# EAGLE board fb_dimmer_up (EAGLE 5.03)
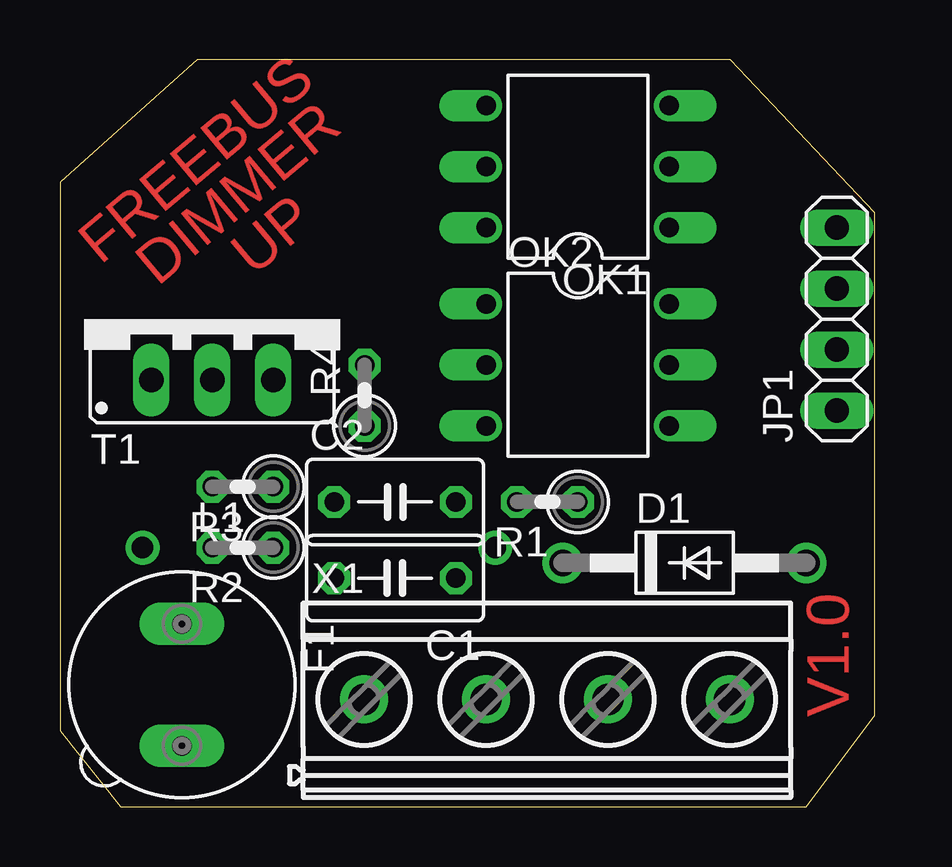
[diagram p0: board, top side]
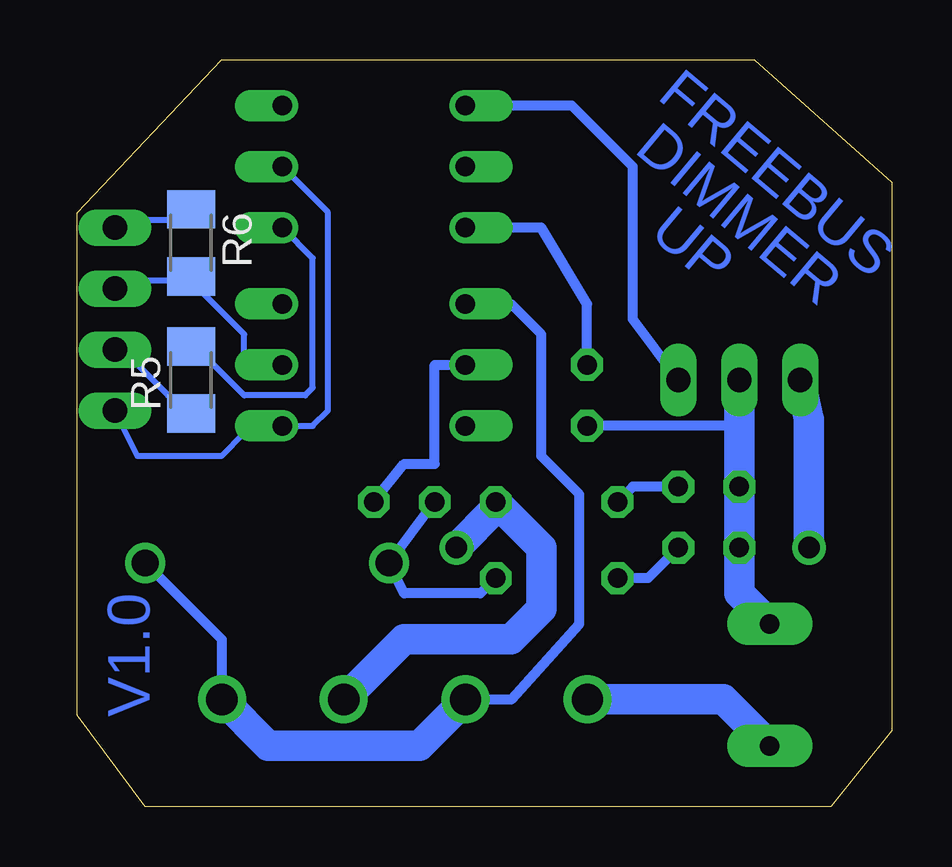
[diagram p1: board, bottom side, seen from below]

Size 33.96 x 31.11 mm. Coordinates in mm from the lower left corner, seen from the top.
Outline: 2.54,0 31.12,0 33.96,3.81 33.96,24.75 27.94,31.11 5.71,31.11 0,26.02 0,3.17 2.54,0
Copper layers (1*16): Top 0.035mm / dielectric 1.5mm / Bottom 0.035mm
Design rules "default": minimum track width 10mil, minimum drill 24mil, track to track 8mil, track to pad 8mil, pad to pad 8mil, via to via 8mil, smd to smd 8mil, copper to edge 40mil, drill to drill 8mil, minimum pad ring 10mil, minimum via ring 8mil, stop-mask expansion 4mil, vias tented up to drill 0mil, thermal gap 10mil
Net classes: 1 230V: width 0.508 mm, clearance 1.524 mm
bKeepout: 4 lines

## Footprints (pad centres in the part's own frame; a part is rotated, then mirrored left to right if it is on the bottom)
C050-035X075 = drill 0.813 octagon: 1 -2.54,0; 2 2.54,0
DO41-10 = drill 1.118 round: A 5.08,0; C -5.08,0
19560 = drill 0.813 pad 1.778 long: 1 -2.54,0; 2 2.54,0
1X04 = drill 1.016 long: 1 -3.81,0; 2 -1.27,0; 3 1.27,0; 4 3.81,0
TJ3-U2 = drill 0.9 round: 1 -7.35,0; 2 7.35,0
DIL06 = drill 0.813 offset: 1 -2.54,-3.81; 2 0,-3.81; 3 2.54,-3.81; 4 2.54,3.81; 5 0,3.81; 6 -2.54,3.81
0207/2V = drill 0.813 octagon: 1 -1.27,0; 2 1.27,0
M1206 = smd 1.6 x 2: 1 -1.4,0; 2 1.4,0
TO220DS = drill 1.016 long: A1 -2.54,-2.54; A2 0,-2.54; G 2.54,-2.54
MKDSN1,5/4-5,08 = drill 1.3 pad 2 round: 1 -7.641,0.025; 2 -2.561,0.025; 3 2.519,0.025; 4 7.599,0.025

## Placement (x,y rotation side)
C1  47nF/230V~  [C050-035X075]  13.97,9.53 180 top
C2  10nF/230V~  [C050-035X075]  13.97,12.7 0 top
D1  1N4007  [DO41-10]  26.04,10.16 0 top
F1  2A Flink  [19560]  5.08,5.08 270 top
JP1  [1X04]  32.38,20.32 90 top
L1  [TJ3-U2]  10.79,10.79 0 top
OK1  MOC3020M  [DIL06]  21.59,26.67 90 top
OK2  CNY17  [DIL06]  21.59,18.41 270 top
R1  [0207/2V]  20.32,12.7 180 top
R2  [0207/2V]  7.62,10.79 180 top
R3  [0207/2V]  7.62,13.34 180 top
R4  [0207/2V]  12.7,17.14 90 top
R5  330R  [M1206]  29.21,17.78 90 bottom
R6  10k  [M1206]  29.21,23.5 270 bottom
T1  TIC225S  [TO220DS]  6.35,20.32 0 top
X1  MKDSN1,5/4-5,08  [MKDSN1,5/4-5,08]  20.32,4.45 0 top

## Library data of the parts
C1 C2 L1 R1-R6 = rcl
D1 = diode
F1 = fuse
JP1 = pinhead
OK1 OK2 = optocoupler
T1 = triac
X1 = con-phoenix-508

## Nets
N$1: OK2.2 R1.1
N$2: C1.2 R2.1
N$3 [230V]: F1.1 R2.2 R3.2 R4.1 T1.A2
N$4 [230V]: D1.A OK2.1 X1.2 X1.4
N$5: OK1.6 R4.2
N$6 [230V]: C1.1 D1.C R1.2
N$7 [230V]: OK1.4 T1.G
N$8: JP1.1 OK1.2 OK2.4
N$9 [230V]: L1.1 T1.A1
N$10 [230V]: C2.1 R3.1
N$11 [230V]: F1.2 X1.1
N$12 [230V]: C2.2 L1.2 X1.3
N$13: OK1.1 R5.2
N$14: JP1.3 OK2.5 R6.2
N$15: JP1.4 R6.1
N$16: JP1.2 R5.1

## Tracks (layer width: path | path; a pad name or v marks a point on that pad's centre or on a via)
N$1
  Bottom 0.406: OK2.2 19.05,18.41 19.05,14.29 20.32,14.29 R1.1
N$2
  Bottom 0.406: C1.2 10.16,9.53 R2.1
N$3
  Bottom 0.406: 6.35,15.88 R4.1
  Bottom 1.27: T1.A2 6.35,15.88 R3.2 R2.2 6.35,8.89 F1.1
N$4
  Bottom 0.406: X1.4 27.92,6.96 D1.A | X1.2 15.85,4.47 13.02,7.62 13.02,13.02 14.61,14.61 14.61,19.68 15.88,20.95 OK2.1
  Bottom 1.27: X1.2 19.68,2.54 25.99,2.54 X1.4
N$5
  Bottom 0.406: OK1.6 14.61,24.13 12.7,20.95 R4.2
N$6
  Bottom 0.406: D1.C R1.2 D1.C | D1.C 20.32,8.89 17.14,8.89 C1.1
N$7
  Bottom 0.406: T1.G 10.79,20.32 10.79,26.67 13.34,29.21 OK1.4
N$8
  Bottom 0.254: JP1.1 31.43,14.61 27.94,14.61 26.99,15.56 26.04,15.56 OK2.4 24.13,15.88 23.49,16.51 23.49,24.77 OK1.2
N$9
  Bottom 1.27: L1.1 3.44,16.14 T1.A1
N$10
  Bottom 0.406: R3.1 10.79,13.34 C2.1
N$11
  Bottom 1.27: X1.1 7.01,4.47 F1.2
N$12
  Bottom 0.406: C2.2 16.51,12.43 | X1.3
  Bottom 1.27: 16.51,12.43 L1.2 | X1.3 20.32,6.99 15.88,6.99 14.61,8.26 14.61,10.79 C2.2
N$13
  Bottom 0.254: OK1.1 24.13,22.86 24.13,17.46 24.45,17.14 26.99,17.14 28.26,18.41 R5.2
N$14
  Bottom 0.254: JP1.3 31.12,21.91 30.16,21.91 R6.2 28.89,21.59 26.99,19.68 26.99,18.41 OK2.5
N$15
  Bottom 0.254: R6.1 30.16,24.45 31.12,24.45 JP1.4
N$16
  Bottom 0.254: R5.1 30.16,17.14 31.43,18.41 JP1.2

## Text on the board
Top: FREEBUS | DIMMER | UP | V1.0
Bottom: FREEBUS | DIMMER | UP | V1.0